# Altium PCB 数粒机接收板4通道.PcbDoc
Units mm, origin at the board's own origin, x right, y up, seen from the top; angles counter-clockwise.
Board outline 316 x 52 mm, 2 copper layers (Top Layer, Bottom Layer); 209 components, 115 nets, 612 pads, 93 vias.
Unrouted connection lines stored in the file: 388.
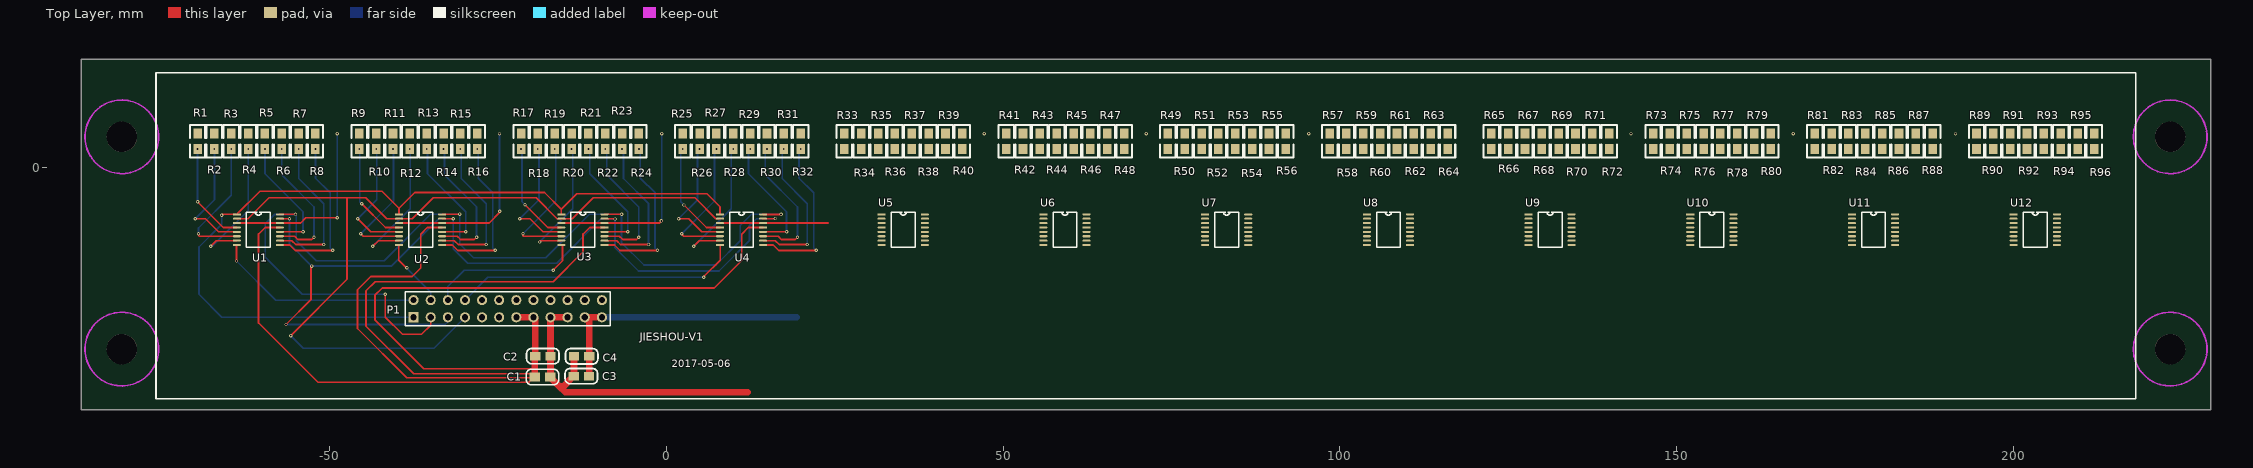
[diagram p0: Top Layer view]
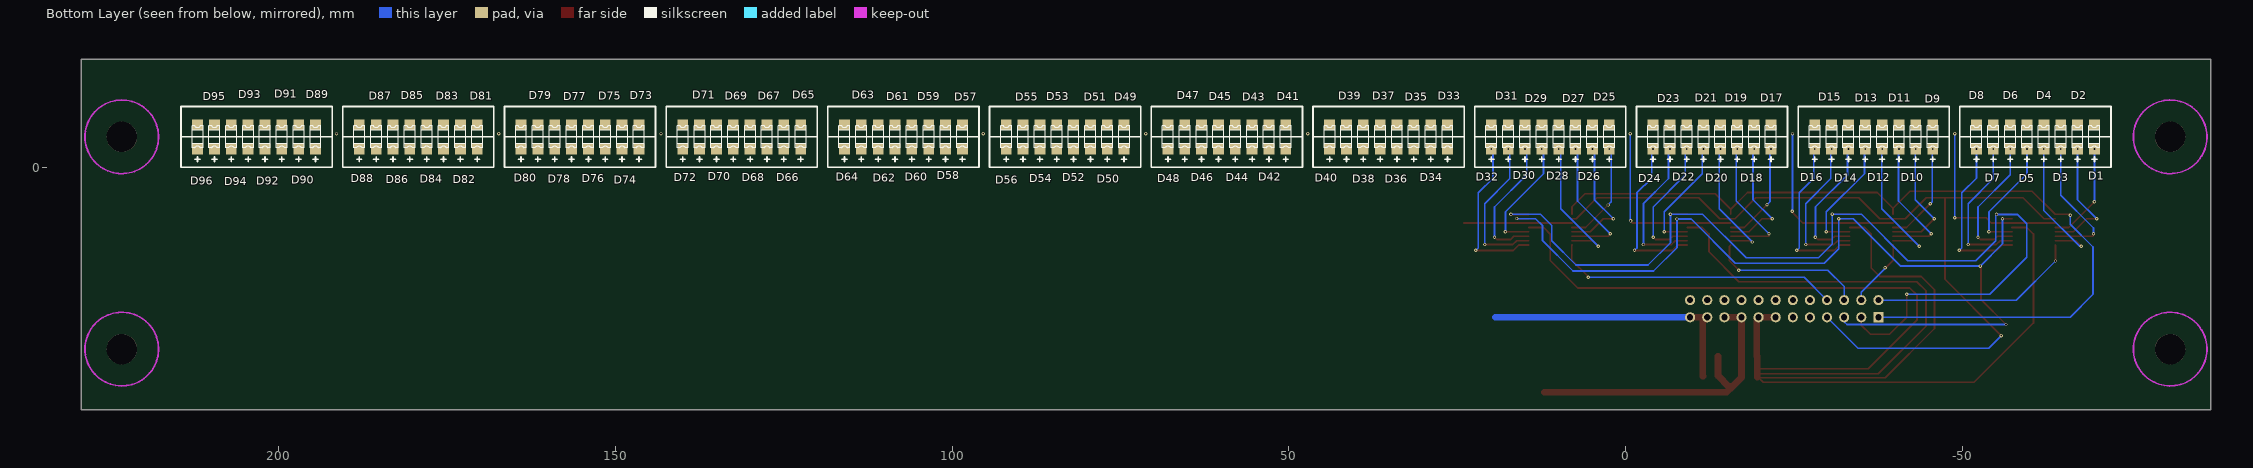
[diagram p1: Bottom Layer view, seen from below]

## Layer stack, top to bottom
Top Layer: signal copper 0.0356
Dielectric: dielectric 0.32, FR-4, Dk 4.8
Bottom Layer: signal copper 0.0356

## Board outline
-86.785,16 -86.785,-36 229.215,-36 229.215,16

## Design rules (kind name [scope] priority, off if disabled: settings)
Clearance [All] p1: gap=0.2
HoleSize [All] p1 off: absolutevalues=TRUE maxlimit=2.54 minlimit=0.025 maxpercent=80.000 minpercent=20.000
MinimumSolderMaskSliver [All] p1 off: minsoldermaskwidth=0.2
PolygonConnect [All] p1: connectstyle=Relief reliefconductorwidth=0.254 reliefentries=4 polygonreliefangle="90 Angle"
RoutingVias [All] p1: holewidth=0.254 width=0.508 viastyle="Through Hole" minholewidth=0.254 minwidth=0.508 maxholewidth=0.254 maxwidth=0.508
SilkToSilkClearance [All] p1: silktosilkclearance=-10
SilkscreenOverComponentPads [All] p1: minsilkscreentomaskgap=0
SolderMaskExpansion [All] p1: expansion=0.102
TestPointUsage [All] p1: valid=0 allowmultiple=FALSE
Testpoint [All] p1: side=3 testpointundercomponent=TRUE minsize=1.016 maxsize=2.54 preferedsize=1.524 minholesize=0 maxholesize=1.016 preferedholesize=0.813 testpointgrid=0.025 style=297 order=0123456789
Width [All] p1: maxlimit=2 minlimit=0.254 preferedwidth=0.254
20 further rules are at their usual default settings.

## Components (designator, comment, footprint, x,y, rotation, side; value= is the part's Value field where it differs from the comment)
C1 "贴片电容 10uf" 0805c -17.209,-31.14 r180 top
C2 "贴片电容" 0805c -17.158,-28.041 r180 top
C3 "贴片电容 10uf" 0805c -13.729,-31.013 r0 top
C4 "贴片电容" 0805c -13.678,-28.067 r0 top
D1 "红外接收珠子" jieshou1206 -69.535,2.7 r0 bottom
D2 "红外接收珠子" jieshou1206 -67.035,2.7 r0 bottom
D3 "红外接收珠子" jieshou1206 -64.535,2.7 r0 bottom
D4 "红外接收珠子" jieshou1206 -62.035,2.7 r0 bottom
D5 "红外接收珠子" jieshou1206 -59.535,2.7 r0 bottom
D6 "红外接收珠子" jieshou1206 -57.035,2.7 r0 bottom
D7 "红外接收珠子" jieshou1206 -54.535,2.7 r0 bottom
D8 "红外接收珠子" jieshou1206 -52.035,2.7 r0 bottom
D9 "红外接收珠子" jieshou1206 -45.535,2.7 r0 bottom
D10 "红外接收珠子" jieshou1206 -43.035,2.7 r0 bottom
D11 "红外接收珠子" jieshou1206 -40.535,2.7 r0 bottom
D12 "红外接收珠子" jieshou1206 -38.035,2.7 r0 bottom
D13 "红外接收珠子" jieshou1206 -35.535,2.7 r0 bottom
D14 "红外接收珠子" jieshou1206 -33.035,2.7 r0 bottom
D15 "红外接收珠子" jieshou1206 -30.535,2.7 r0 bottom
D16 "红外接收珠子" jieshou1206 -28.035,2.7 r0 bottom
D17 "红外接收珠子" jieshou1206 -21.535,2.7 r0 bottom
D18 "红外接收珠子" jieshou1206 -19.035,2.7 r0 bottom
D19 "红外接收珠子" jieshou1206 -16.535,2.7 r0 bottom
D20 "红外接收珠子" jieshou1206 -14.035,2.7 r0 bottom
D21 "红外接收珠子" jieshou1206 -11.535,2.7 r0 bottom
D22 "红外接收珠子" jieshou1206 -9.035,2.7 r0 bottom
D23 "红外接收珠子" jieshou1206 -6.535,2.7 r0 bottom
D24 "红外接收珠子" jieshou1206 -4.035,2.7 r0 bottom
D25 "红外接收珠子" jieshou1206 2.465,2.7 r0 bottom
D26 "红外接收珠子" jieshou1206 4.965,2.7 r0 bottom
D27 "红外接收珠子" jieshou1206 7.465,2.7 r0 bottom
D28 "红外接收珠子" jieshou1206 9.965,2.7 r0 bottom
D29 "红外接收珠子" jieshou1206 12.465,2.7 r0 bottom
D30 "红外接收珠子" jieshou1206 14.965,2.7 r0 bottom
D31 "红外接收珠子" jieshou1206 17.465,2.7 r0 bottom
D32 "红外接收珠子" jieshou1206 19.965,2.7 r0 bottom
D33 "红外接收珠子" jieshou1206 26.465,2.7 r0 bottom
D34 "红外接收珠子" jieshou1206 28.965,2.7 r0 bottom
D35 "红外接收珠子" jieshou1206 31.465,2.7 r0 bottom
D36 "红外接收珠子" jieshou1206 33.965,2.7 r0 bottom
D37 "红外接收珠子" jieshou1206 36.465,2.7 r0 bottom
D38 "红外接收珠子" jieshou1206 38.965,2.7 r0 bottom
D39 "红外接收珠子" jieshou1206 41.465,2.7 r0 bottom
D40 "红外接收珠子" jieshou1206 43.965,2.7 r0 bottom
D41 "红外接收珠子" jieshou1206 50.465,2.7 r0 bottom
D42 "红外接收珠子" jieshou1206 52.965,2.7 r0 bottom
D43 "红外接收珠子" jieshou1206 55.465,2.7 r0 bottom
D44 "红外接收珠子" jieshou1206 57.965,2.7 r0 bottom
D45 "红外接收珠子" jieshou1206 60.465,2.7 r0 bottom
D46 "红外接收珠子" jieshou1206 62.965,2.7 r0 bottom
D47 "红外接收珠子" jieshou1206 65.465,2.7 r0 bottom
D48 "红外接收珠子" jieshou1206 67.965,2.7 r0 bottom
D49 "红外接收珠子" jieshou1206 74.465,2.7 r0 bottom
D50 "红外接收珠子" jieshou1206 76.965,2.7 r0 bottom
D51 "红外接收珠子" jieshou1206 79.465,2.7 r0 bottom
D52 "红外接收珠子" jieshou1206 81.965,2.7 r0 bottom
D53 "红外接收珠子" jieshou1206 84.465,2.7 r0 bottom
D54 "红外接收珠子" jieshou1206 86.965,2.7 r0 bottom
D55 "红外接收珠子" jieshou1206 89.465,2.7 r0 bottom
D56 "红外接收珠子" jieshou1206 91.965,2.7 r0 bottom
D57 "红外接收珠子" jieshou1206 98.465,2.7 r0 bottom
D58 "红外接收珠子" jieshou1206 100.965,2.7 r0 bottom
D59 "红外接收珠子" jieshou1206 103.465,2.7 r0 bottom
D60 "红外接收珠子" jieshou1206 105.965,2.7 r0 bottom
D61 "红外接收珠子" jieshou1206 108.465,2.7 r0 bottom
D62 "红外接收珠子" jieshou1206 110.965,2.7 r0 bottom
D63 "红外接收珠子" jieshou1206 113.465,2.7 r0 bottom
D64 "红外接收珠子" jieshou1206 115.965,2.7 r0 bottom
D65 "红外接收珠子" jieshou1206 122.465,2.7 r0 bottom
D66 "红外接收珠子" jieshou1206 124.965,2.7 r0 bottom
D67 "红外接收珠子" jieshou1206 127.465,2.7 r0 bottom
D68 "红外接收珠子" jieshou1206 129.965,2.7 r0 bottom
D69 "红外接收珠子" jieshou1206 132.465,2.7 r0 bottom
D70 "红外接收珠子" jieshou1206 134.965,2.7 r0 bottom
D71 "红外接收珠子" jieshou1206 137.465,2.7 r0 bottom
D72 "红外接收珠子" jieshou1206 139.965,2.7 r0 bottom
D73 "红外接收珠子" jieshou1206 146.465,2.7 r0 bottom
D74 "红外接收珠子" jieshou1206 148.965,2.7 r0 bottom
D75 "红外接收珠子" jieshou1206 151.465,2.7 r0 bottom
D76 "红外接收珠子" jieshou1206 153.965,2.7 r0 bottom
D77 "红外接收珠子" jieshou1206 156.465,2.7 r0 bottom
D78 "红外接收珠子" jieshou1206 158.965,2.7 r0 bottom
D79 "红外接收珠子" jieshou1206 161.465,2.7 r0 bottom
D80 "红外接收珠子" jieshou1206 163.965,2.7 r0 bottom
D81 "红外接收珠子" jieshou1206 170.465,2.7 r0 bottom
D82 "红外接收珠子" jieshou1206 172.965,2.7 r0 bottom
D83 "红外接收珠子" jieshou1206 175.465,2.7 r0 bottom
D84 "红外接收珠子" jieshou1206 177.965,2.7 r0 bottom
D85 "红外接收珠子" jieshou1206 180.465,2.7 r0 bottom
D86 "红外接收珠子" jieshou1206 182.965,2.7 r0 bottom
D87 "红外接收珠子" jieshou1206 185.465,2.7 r0 bottom
D88 "红外接收珠子" jieshou1206 187.965,2.7 r0 bottom
D89 "红外接收珠子" jieshou1206 194.465,2.7 r0 bottom
D90 "红外接收珠子" jieshou1206 196.965,2.7 r0 bottom
D91 "红外接收珠子" jieshou1206 199.465,2.7 r0 bottom
D92 "红外接收珠子" jieshou1206 201.965,2.7 r0 bottom
D93 "红外接收珠子" jieshou1206 204.465,2.7 r0 bottom
D94 "红外接收珠子" jieshou1206 206.965,2.7 r0 bottom
D95 "红外接收珠子" jieshou1206 209.465,2.7 r0 bottom
D96 "红外接收珠子" jieshou1206 211.965,2.7 r0 bottom
P1 "牛角插座" HDR2X12 -37.478,-22.276 r0 top
R1 "贴片电阻" 0805r -69.543,4.986 r270 top
R2 "贴片电阻" 0805r -67.043,4.986 r270 top
R3 "贴片电阻" 0805r -64.543,4.986 r270 top
R4 "贴片电阻" 0805r -62.043,4.986 r270 top
R5 "贴片电阻" 0805r -59.543,4.986 r270 top
R6 "贴片电阻" 0805r -57.043,4.986 r270 top
R7 "贴片电阻" 0805r -54.543,4.986 r270 top
R8 "贴片电阻" 0805r -52.043,4.986 r270 top
R9 "贴片电阻" 0805r -45.535,4.986 r270 top
R10 "贴片电阻" 0805r -43.035,4.986 r270 top
R11 "贴片电阻" 0805r -40.535,4.986 r270 top
R12 "贴片电阻" 0805r -38.035,4.986 r270 top
R13 "贴片电阻" 0805r -35.535,4.986 r270 top
R14 "贴片电阻" 0805r -33.035,4.986 r270 top
R15 "贴片电阻" 0805r -30.535,4.986 r270 top
R16 "贴片电阻" 0805r -28.035,4.986 r270 top
R17 "贴片电阻" 0805r -21.535,4.986 r270 top
R18 "贴片电阻" 0805r -19.035,4.986 r270 top
R19 "贴片电阻" 0805r -16.535,4.986 r270 top
R20 "贴片电阻" 0805r -14.035,4.986 r270 top
R21 "贴片电阻" 0805r -11.535,4.986 r270 top
R22 "贴片电阻" 0805r -9.035,4.986 r270 top
R23 "贴片电阻" 0805r -6.535,4.986 r270 top
R24 "贴片电阻" 0805r -4.035,4.986 r270 top
R25 "贴片电阻" 0805r 2.465,4.986 r270 top
R26 "贴片电阻" 0805r 4.965,4.986 r270 top
R27 "贴片电阻" 0805r 7.465,4.986 r270 top
R28 "贴片电阻" 0805r 9.965,4.986 r270 top
R29 "贴片电阻" 0805r 12.465,4.986 r270 top
R30 "贴片电阻" 0805r 14.965,4.986 r270 top
R31 "贴片电阻" 0805r 17.465,4.986 r270 top
R32 "贴片电阻" 0805r 19.965,4.986 r270 top
R33 "贴片电阻" 0805r 26.457,4.986 r270 top
R34 "贴片电阻" 0805r 28.957,4.986 r270 top
R35 "贴片电阻" 0805r 31.457,4.986 r270 top
R36 "贴片电阻" 0805r 33.957,4.986 r270 top
R37 "贴片电阻" 0805r 36.457,4.986 r270 top
R38 "贴片电阻" 0805r 38.957,4.986 r270 top
R39 "贴片电阻" 0805r 41.457,4.986 r270 top
R40 "贴片电阻" 0805r 43.957,4.986 r270 top
R41 "贴片电阻" 0805r 50.465,4.986 r270 top
R42 "贴片电阻" 0805r 52.965,4.986 r270 top
R43 "贴片电阻" 0805r 55.465,4.986 r270 top
R44 "贴片电阻" 0805r 57.965,4.986 r270 top
R45 "贴片电阻" 0805r 60.465,4.986 r270 top
R46 "贴片电阻" 0805r 62.965,4.986 r270 top
R47 "贴片电阻" 0805r 65.465,4.986 r270 top
R48 "贴片电阻" 0805r 67.965,4.986 r270 top
R49 "贴片电阻" 0805r 74.465,4.986 r270 top
R50 "贴片电阻" 0805r 76.965,4.986 r270 top
R51 "贴片电阻" 0805r 79.465,4.986 r270 top
R52 "贴片电阻" 0805r 81.965,4.986 r270 top
R53 "贴片电阻" 0805r 84.465,4.986 r270 top
R54 "贴片电阻" 0805r 86.965,4.986 r270 top
R55 "贴片电阻" 0805r 89.465,4.986 r270 top
R56 "贴片电阻" 0805r 91.965,4.986 r270 top
R57 "贴片电阻" 0805r 98.465,4.986 r270 top
R58 "贴片电阻" 0805r 100.965,4.986 r270 top
R59 "贴片电阻" 0805r 103.465,4.986 r270 top
R60 "贴片电阻" 0805r 105.965,4.986 r270 top
R61 "贴片电阻" 0805r 108.465,4.986 r270 top
R62 "贴片电阻" 0805r 110.965,4.986 r270 top
R63 "贴片电阻" 0805r 113.465,4.986 r270 top
R64 "贴片电阻" 0805r 115.965,4.986 r270 top
R65 "贴片电阻" 0805r 122.457,4.986 r270 top
R66 "贴片电阻" 0805r 124.957,4.986 r270 top
R67 "贴片电阻" 0805r 127.457,4.986 r270 top
R68 "贴片电阻" 0805r 129.957,4.986 r270 top
R69 "贴片电阻" 0805r 132.457,4.986 r270 top
R70 "贴片电阻" 0805r 134.957,4.986 r270 top
R71 "贴片电阻" 0805r 137.457,4.986 r270 top
R72 "贴片电阻" 0805r 139.957,4.986 r270 top
R73 "贴片电阻" 0805r 146.465,4.986 r270 top
R74 "贴片电阻" 0805r 148.965,4.986 r270 top
R75 "贴片电阻" 0805r 151.465,4.986 r270 top
R76 "贴片电阻" 0805r 153.965,4.986 r270 top
R77 "贴片电阻" 0805r 156.465,4.986 r270 top
R78 "贴片电阻" 0805r 158.965,4.986 r270 top
R79 "贴片电阻" 0805r 161.465,4.986 r270 top
R80 "贴片电阻" 0805r 163.965,4.986 r270 top
R81 "贴片电阻" 0805r 170.465,4.986 r270 top
R82 "贴片电阻" 0805r 172.965,4.986 r270 top
R83 "贴片电阻" 0805r 175.465,4.986 r270 top
R84 "贴片电阻" 0805r 177.965,4.986 r270 top
R85 "贴片电阻" 0805r 180.465,4.986 r270 top
R86 "贴片电阻" 0805r 182.965,4.986 r270 top
R87 "贴片电阻" 0805r 185.465,4.986 r270 top
R88 "贴片电阻" 0805r 187.965,4.986 r270 top
R89 "贴片电阻" 0805r 194.465,4.986 r270 top
R90 "贴片电阻" 0805r 196.965,4.986 r270 top
R91 "贴片电阻" 0805r 199.465,4.986 r270 top
R92 "贴片电阻" 0805r 201.965,4.986 r270 top
R93 "贴片电阻" 0805r 204.465,4.986 r270 top
R94 "贴片电阻" 0805r 206.965,4.986 r270 top
R95 "贴片电阻" 0805r 209.465,4.986 r270 top
R96 "贴片电阻" 0805r 211.965,4.986 r270 top
U1 "集成电路" TSSOP16 -63.716,-7 r0 top
U2 "集成电路" TSSOP16 -39.637,-7 r0 top
U3 "集成电路" TSSOP16 -15.558,-7 r0 top
U4 "集成电路" TSSOP16 7.988,-7 r0 top
U5 "集成电路" TSSOP16 31.988,-7 r0 top
U6 "集成电路" TSSOP16 55.988,-7 r0 top
U7 "集成电路" TSSOP16 79.988,-7 r0 top
U8 "集成电路" TSSOP16 103.988,-7 r0 top
U9 "集成电路" TSSOP16 127.988,-7 r0 top
U10 "集成电路" TSSOP16 151.988,-7 r0 top
U11 "集成电路" TSSOP16 175.988,-7 r0 top
U12 "集成电路" TSSOP16 199.988,-7 r0 top

## Footprints (in the part's own frame and the unit in brackets; to place one, negate y for a bottom-side part, rotate by r counter-clockwise, add the part's x,y. Pads: shape width x height; smd on the part's side, far side on the other; paste and mask are expansions set on the pad)
0805c [mil]
  rect 60x50 smd: 1(0,0) 2(90,0)
  silkscreen extent -50,-45 140,45
0805r [mil]
  rect 60x50 smd: 1(0,0) 2(90,0)
  silkscreen extent -50,-45 140,45
HDR2X12 [mm] "Connector; Header; 12x2 Position"
  rect 1.5x1.5 hole 0.9: 1(0,0)
  round 1.5 hole 0.9: 2(0,2.54) 3(2.54,0) 4(2.54,2.54) 5(5.08,0) 6(5.08,2.54) 7(7.62,0) 8(7.62,2.54) 9(10.16,0) 10(10.16,2.54) 11(12.7,0) 12(12.7,2.54) 13(15.24,0) 14(15.24,2.54) 15(17.78,0) 16(17.78,2.54) 17(20.32,0) 18(20.32,2.54) 19(22.86,0) 20(22.86,2.54) 21(25.4,0) 22(25.4,2.54) 23(27.94,0) 24(27.94,2.54)
  silkscreen extent -1.27,-1.27 29.21,3.81
jieshou1206 [mm]
  rect 1.6x1.6 smd: 1(0,0) 2(0,-3.6)
  silkscreen extent -0.8,-3.41 0.82,1.9
TSSOP16 [mm] "ADG708"
  rect 1.2x0.3 smd: 1(0,0)
  oval 1.2x0.3 smd: 2(0,-0.65) 3(0,-1.3) 4(0,-1.95) 5(0,-2.6) 6(0,-3.25) 7(0,-3.9) 8(0,-4.55) 9(6.4,-4.55) 10(6.4,-3.9) 11(6.4,-3.25) 12(6.4,-2.6) 13(6.4,-1.95) 14(6.4,-1.3) 15(6.4,-0.65) 16(6.4,0)
  silkscreen extent 1.43,-4.88 4.96,0.33

## Part data
C1 C2 C3 C4: library part Cap, "Capacitor"
D1 D2 D3 D4 D5 D6 D7 D8 D9 D10 D11 D12 D13 D14 D15 D16 D17 D18 D19 D20 D21 D22 D23 D24 D25 D26 D27 D28 D29 D30 D31 D32 D33 D34 D35 D36 D37 D38 D39 D40 D41 D42 D43 D44 D45 D46 D47 D48 D49 D50 D51 D52 D53 D54 D55 D56 D57 D58 D59 D60 D61 D62 D63 D64 D65 D66 D67 D68 D69 D70 D71 D72 D73 D74 D75 D76 D77 D78 D79 D80 D81 D82 D83 D84 D85 D86 D87 D88 D89 D90 D91 D92 D93 D94 D95 D96: library part LED0, "PD15-21B/TR8"
P1: library part "Header 12X2", "Header, 12-Pin, Dual row"
R1 R2 R3 R4 R5 R6 R7 R8 R9 R10 R11 R12 R13 R14 R15 R16 R17 R18 R19 R20 R21 R22 R23 R24 R25 R26 R27 R28 R29 R30 R31 R32: library part Res3
R33 R34 R35 R36 R37 R38 R39 R40 R41 R42 R43 R44 R45 R46 R47 R48 R49 R50 R51 R52 R53 R54 R55 R56 R57 R58 R59 R60 R61 R62 R63 R64 R65 R66 R67 R68 R69 R70 R71 R72 R73 R74 R75 R76 R77 R78 R79 R80 R81 R82 R83 R84 R85 R86 R87 R88 R89 R90 R91 R92 R93 R94 R95 R96: library part Res3, "电阻"
U1 U2 U3 U4: library part ADG708
U5 U6 U7 U8 U9 U10 U11 U12: library part ADG708, "ADG708BRU-REEL"

## Free pads (board coordinates)
  round 4.5 hole 4.5 unplated: 1(-80.785,4.5) 2(-80.785,-27) 5(223.215,4.5) 6(223.215,-27)

## Via types
v1: diameter 0.508, hole 0.254, Top Layer to Bottom Layer, 93 vias

## Nets (pads, with @x,y where several pads share a name; then routed paths per layer and width w, separated by ;. In a path a pad name is that pad's centre, name@x,y a point inside that pad or via, vN(x,y) a via of type N, cw(c..) or ccw(c..) an arc to the next point about the centre after c; other vN are vias at no path point)
A0: P1.1 U1.1 U2.1 U3.1 U4.1 U5.1 U6.1 U7.1 U8.1 U9.1 U10.1 U11.1 U12.1 | length 129.5
  Top Layer w0.254: v1(-65.977,-7.137) -65.84,-7 U1.1 -60.272,-3.556 -42.177,-3.556 -39.637,-6.096 ; U2.1 -39.637,-6.096 ; U3.1 -15.558,-6.248 ; U4.1 7.988,-5.867 6.058,-3.937 -13.246,-3.937 -15.558,-6.248 ; -39.637,-6.096 -37.3,-3.759 -18.047,-3.759 -15.558,-6.248
  Bottom Layer w0.254: v1(-65.977,-7.137) -65.951,-7.163 -65.951,-8.458 -69.33,-11.836 -69.33,-18.872 -65.926,-22.276 P1.1
A1: P1.3 U1.16 U2.16 U3.16 U4.16 U5.16 U6.16 U7.16 U8.16 U9.16 U10.16 U11.16 U12.16 | length 151.1
  Top Layer w0.254: U1.16 -55.014,-7 v1(-55.004,-7.01) ; v1(-41.669,-18.872) -41.669,-22.276 -39.129,-24.816 -36.31,-24.816 -34.938,-23.444 P1.3 ; U2.16 v1@-30.706,-7 ; U3.16 -6.632,-7 v1(-6.617,-6.985) ; U4.16 14.398,-7.01 v1(17.056,-7.01)
  Bottom Layer w0.254: v1(-41.669,-18.872) -53.988,-18.872 -59.474,-13.386 -59.474,-8.407 -58.077,-7.01 v1(-55.004,-7.01) -54.877,-7.137 -54.877,-10.896 -51.905,-13.868 -41.847,-13.868 -34.979,-7 -30.686,-7 v1(-30.645,-6.959) -30.645,-11.404 -28.588,-13.462 -17.844,-13.462 -11.367,-6.985 v1(-6.617,-6.985) -6.617,-11.201 -3.29,-14.529 7.404,-14.529 11.011,-10.922 11.011,-8.661 12.672,-7 17.046,-7 v1(17.056,-7.01)
A2: P1.5 U1.15 U2.15 U3.15 U4.15 U5.15 U6.15 U7.15 U8.15 U9.15 U10.15 U11.15 U12.15 | length 139.9
  Top Layer w0.254: U1.15 v1(-55.898,-7.65) ; v1(-56.411,-23.353) -52.718,-19.659 -52.718,-14.808 v1(-52.591,-14.681) ; U2.15 v1(-31.611,-7.65) ; U3.15 v1@-7.582,-7.65 ; U4.15 16.187,-7.65 v1(16.218,-7.62)
  Bottom Layer w0.254: v1(-56.411,-23.353) -32.815,-23.353 -32.398,-22.936 P1.5 ; v1(-55.898,-7.65) -55.898,-11.374 v1(-52.591,-14.681) -40.78,-14.681 -33.749,-7.65 v1(-31.611,-7.65) -31.611,-12.09 -29.452,-14.249 -16.244,-14.249 -9.69,-7.696 v1(-7.582,-7.696) -7.582,-11.938 -4.102,-15.418 7.836,-15.418 12.357,-10.896 12.357,-8.712 13.419,-7.65 16.187,-7.65 v1(16.218,-7.62)
CH1: P1.2 U1.8 | length 31.1
  Top Layer w0.254: v1(-63.767,-13.919) -63.767,-11.601 U1.8
  Bottom Layer w0.254: v1(-63.767,-13.919) -57.95,-19.736 P1.2
CH1-1: D1.1 R1.2 U1.4 | length 15.2
  Top Layer w0.254: v1(-69.543,-5.128) -65.72,-8.95 U1.4
  Bottom Layer w0.254: v1(-69.543,-5.128) -69.535,-5.12 v1(-69.535,2.7)
CH1-2: D2.1 R2.2 U1.5 | length 18.5
  Top Layer w0.254: v1(-69.863,-7.671) -68.364,-7.671 -66.435,-9.6 U1.5
  Bottom Layer w0.254: v1(-69.863,-7.671) -67.035,-4.843 D2.1
  other v1: -67.043,2.7
CH1-3: D3.1 R3.2 U1.6 | length 20.6
  Top Layer w0.254: v1(-69.406,-9.88) -69.406,-10.109 -69.265,-10.25 U1.6
  Bottom Layer w0.254: v1(-69.406,-9.88) -69.406,-9.017 -64.535,-4.146 v1(-64.535,2.7)
CH1-4: D4.1 R4.2 U1.7 | length 21.1
  Top Layer w0.254: v1(-67.602,-11.737) -66.766,-10.9 U1.7
  Bottom Layer w0.254: v1(-67.602,-11.737) -67.341,-11.737 -62.035,-6.431 v1(-62.035,2.7)
CH1-5: D5.1 R5.2 U1.12 | length 18.1
  Top Layer w0.254: U1.12 -53.911,-9.6 v1(-53.886,-9.576)
  Bottom Layer w0.254: D5.1 -59.535,-0.981 -53.886,-6.629 v1(-53.886,-9.576)
  other v1: -59.543,2.7
CH1-6: D6.1 R6.2 U1.11 | length 20.5
  Top Layer w0.254: U1.11 -55.142,-10.25 -54.648,-10.744 -52.616,-10.744 v1(-52.261,-10.388)
  Bottom Layer w0.254: D6.1 -57.035,-1.144 -52.261,-5.918 v1(-52.261,-10.388)
  other v1: -57.043,2.7
CH1-7: D7.1 R7.2 U1.10 | length 22.5
  Top Layer w0.254: U1.10 -55.559,-10.9 -54.979,-11.481 v1(-50.813,-11.481)
  Bottom Layer w0.254: v1(-54.535,2.7) -54.535,-1.688 -50.813,-5.41 v1(-50.813,-11.481)
CH1-8: D8.1 R8.2 U1.9 | length 24.3
  Top Layer w0.254: U1.9 -55.874,-11.55 -55.055,-12.37 -49.518,-12.37 v1(-49.492,-12.344)
  Bottom Layer w0.254: v1(-52.035,2.7) -52.035,-1.623 -49.848,-3.81 -49.848,-11.989 v1(-49.492,-12.344)
CH2: P1.4 U2.8 | length 10.3
  Top Layer w0.254: U2.8 -39.688,-11.601 -39.688,-13.817 -38.57,-14.935 v1(-38.469,-14.935)
  Bottom Layer w0.254: v1(-38.469,-14.935) -38.494,-14.96 -38.494,-14.986 -34.938,-18.542 P1.4
CH2-1: D9.1 R9.2 U2.4 | length 15.3
  Top Layer w0.254: v1(-45.156,-5.435) -41.641,-8.95 U2.4
  Bottom Layer w0.254: v1(-45.535,2.7) -45.464,2.629 -45.464,-5.128 v1(-45.156,-5.435)
CH2-2: D10.1 R10.2 U2.5 | length 18.5
  Top Layer w0.254: v1(-45.784,-7.671) -43.854,-9.6 U2.5
  Bottom Layer w0.254: v1(-45.784,-7.671) -42.956,-4.843 D10.1@-42.956,2.7
  other v1: -43.035,2.7
CH2-3: D11.1 R11.2 U2.6 | length 20.4
  Top Layer w0.254: v1(-45.327,-9.88) -44.957,-10.25 U2.6
  Bottom Layer w0.254: v1(-45.327,-9.88) -40.456,-5.01 D11.1@-40.456,2.7
  other v1: -40.535,2.7
CH2-4: D12.1 R12.2 U2.7 | length 21
  Top Layer w0.254: v1(-43.523,-11.737) -42.686,-10.9 U2.7
  Bottom Layer w0.254: v1(-43.523,-11.737) -37.956,-6.169 D12.1@-37.956,2.7
  other v1: -38.035,2.7
CH2-5: D13.1 R13.2 U2.12 | length 18.1
  Top Layer w0.254: U2.12@-33.186,-9.6 -29.781,-9.6 v1(-29.756,-9.576)
  Bottom Layer w0.254: D13.1@-35.405,2.7 -35.405,-0.981 -29.756,-6.629 v1(-29.756,-9.576)
  other v1: -35.535,2.7
CH2-6: D14.1 R14.2 U2.11 | length 20.5
  Top Layer w0.254: U2.11@-33.186,-10.25 -31.012,-10.25 -30.518,-10.744 -28.486,-10.744 v1(-28.131,-10.388)
  Bottom Layer w0.254: D14.1@-32.905,2.7 -32.905,-1.144 -28.131,-5.918 v1(-28.131,-10.388)
  other v1: -33.035,2.7
CH2-7: D15.1 R15.2 U2.10 | length 22.5
  Top Layer w0.254: U2.10@-33.186,-10.9 -31.429,-10.9 -30.849,-11.481 v1(-26.683,-11.481)
  Bottom Layer w0.254: D15.1@-30.405,2.7 -30.405,-1.688 -26.683,-5.41 v1(-26.683,-11.481)
  other v1: -30.535,2.7
CH2-8: D16.1 R16.2 U2.9 | length 24.3
  Top Layer w0.254: U2.9@-33.186,-11.55 -31.744,-11.55 -30.925,-12.37 -25.388,-12.37 v1(-25.362,-12.344)
  Bottom Layer w0.254: D16.1@-27.905,2.7 -27.905,-1.623 -25.718,-3.81 -25.718,-11.989 v1(-25.362,-12.344)
  other v1: -28.035,2.7
CH3: P1.6 U3.8 | length 23.1
  Top Layer w0.254: v1(-16.752,-15.291) -16.752,-15.265 -15.38,-13.894 -15.38,-11.728 U3.8
  Bottom Layer w0.254: P1.6 -32.398,-17.704 -29.985,-15.291 v1(-16.752,-15.291)
CH3-1: D17.1 R17.2 U3.4 | length 15.3
  Top Layer w0.254: v1(-20.944,-5.568) -17.562,-8.95 U3.4
  Bottom Layer w0.254: v1(-21.535,2.7) -21.385,2.55 -21.385,-5.128 v1(-20.944,-5.568)
CH3-2: D18.1 R18.2 U3.5 | length 18.5
  Top Layer w0.254: v1(-21.705,-7.671) -20.206,-7.671 -18.277,-9.6 U3.5
  Bottom Layer w0.254: v1(-21.705,-7.671) -18.877,-4.843 D18.1@-18.877,2.7
  other v1: -19.035,2.7
CH3-3: D19.1 R19.2 U3.6 | length 20.6
  Top Layer w0.254: v1(-21.247,-9.88) -21.247,-10.185 -21.183,-10.25 U3.6
  Bottom Layer w0.254: v1(-21.247,-9.88) -16.377,-5.01 D19.1@-16.377,2.7
  other v1: -16.535,2.7
CH3-4: D20.1 R20.2 U3.7 | length 19.1
  Top Layer w0.254: v1(-18.758,-11.1) -18.758,-11.051 -18.607,-10.9 U3.7
  Bottom Layer w0.254: v1(-18.758,-11.1) -18.758,-11.051 -13.877,-6.169 D20.1@-13.877,2.7
  other v1: -14.035,2.7
CH3-5: D21.1 R21.2 U3.12 | length 18.1
  Top Layer w0.254: U3.12@-9.107,-9.6 -5.702,-9.6 v1(-5.677,-9.576)
  Bottom Layer w0.254: D21.1@-11.326,2.7 -11.326,-0.981 -5.677,-6.629 v1(-5.677,-9.576)
  other v1: -11.535,2.7
CH3-6: D22.1 R22.2 U3.11 | length 20.5
  Top Layer w0.254: U3.11@-9.107,-10.25 -6.933,-10.25 -6.439,-10.744 -4.407,-10.744 v1(-4.052,-10.388)
  Bottom Layer w0.254: D22.1@-8.826,2.7 -8.826,-1.144 -4.052,-5.918 v1(-4.052,-10.388)
  other v1: -9.035,2.7
CH3-7: D23.1 R23.2 U3.10 | length 22.5
  Top Layer w0.254: U3.10@-9.107,-10.9 -7.35,-10.9 -6.769,-11.481 v1(-2.604,-11.481)
  Bottom Layer w0.254: D23.1@-6.326,2.7 -6.326,-1.688 -2.604,-5.41 v1(-2.604,-11.481)
  other v1: -6.535,2.7
CH3-8: D24.1 R24.2 U3.9 | length 24.3
  Top Layer w0.254: U3.9@-9.107,-11.55 -7.665,-11.55 -6.846,-12.37 -1.308,-12.37 v1(-1.283,-12.344)
  Bottom Layer w0.254: D24.1@-3.826,2.7 -3.826,-1.623 -1.639,-3.81 -1.639,-11.989 v1(-1.283,-12.344)
  other v1: -4.035,2.7
CH4: P1.8 U4.8 | length 42.6
  Top Layer w0.254: v1(5.6,-16.332) 5.6,-16.23 8.039,-13.792 8.039,-11.601 U4.8
  Bottom Layer w0.254: P1.8 -26.48,-16.357 v1@5.499,-16.357
CH4-1: D25.1 R25.2 U4.4 | length 15.4
  Top Layer w0.254: v1(2.644,-5.611) 5.984,-8.95 U4.4
  Bottom Layer w0.254: v1(2.465,2.7) 2.161,2.396 2.161,-5.128 v1(2.644,-5.611)
CH4-2: D26.1 R26.2 U4.5 | length 18.5
  Top Layer w0.254: v1(1.841,-7.671) 3.34,-7.671 5.269,-9.6 U4.5
  Bottom Layer w0.254: v1(1.841,-7.671) 4.669,-4.843 D26.1@4.669,2.7
  other v1: 4.965,2.7
CH4-3: D27.1 R27.2 U4.6 | length 20.5
  Top Layer w0.254: v1(2.298,-9.88) 2.298,-9.931 2.617,-10.25 U4.6
  Bottom Layer w0.254: v1(2.298,-9.88) 7.169,-5.01 D27.1@7.169,2.7
  other v1: 7.465,2.7
CH4-4: D28.1 R28.2 U4.7 | length 21
  Top Layer w0.254: v1(4.102,-11.737) 4.939,-10.9 U4.7
  Bottom Layer w0.254: v1(4.102,-11.737) 9.669,-6.169 D28.1@9.669,2.7
  other v1: 9.965,2.7
CH4-5: D29.1 R29.2 U4.12 | length 18.1
  Top Layer w0.254: U4.12@14.439,-9.6 17.844,-9.6 v1(17.869,-9.576)
  Bottom Layer w0.254: D29.1@12.22,2.7 12.22,-0.981 17.869,-6.629 v1(17.869,-9.576)
  other v1: 12.465,2.7
CH4-6: D30.1 R30.2 U4.11 | length 20.5
  Top Layer w0.254: U4.11@14.439,-10.25 16.613,-10.25 17.107,-10.744 19.139,-10.744 v1(19.494,-10.388)
  Bottom Layer w0.254: D30.1@14.72,2.7 14.72,-1.144 19.494,-5.918 v1(19.494,-10.388)
  other v1: 14.965,2.7
CH4-7: D31.1 R31.2 U4.10 | length 22.5
  Top Layer w0.254: U4.10@14.439,-10.9 16.196,-10.9 16.776,-11.481 v1(20.942,-11.481)
  Bottom Layer w0.254: D31.1@17.22,2.7 17.22,-1.688 20.942,-5.41 v1(20.942,-11.481)
  other v1: 17.465,2.7
CH4-8: D32.1 R32.2 U4.9 | length 24.3
  Top Layer w0.254: U4.9@14.439,-11.55 15.881,-11.55 16.7,-12.37 22.237,-12.37 v1(22.263,-12.344)
  Bottom Layer w0.254: D32.1@19.72,2.7 19.72,-1.623 21.907,-3.81 21.907,-11.989 v1(22.263,-12.344)
  other v1: 19.965,2.7
CH5: P1.10 U5.8
CH5-1: D33.1 R33.2 U5.4
CH5-2: D34.1 R34.2 U5.5
CH5-3: D35.1 R35.2 U5.6
CH5-4: D36.1 R36.2 U5.7
CH5-5: D37.1 R37.2 U5.12
CH5-6: D38.1 R38.2 U5.11
CH5-7: D39.1 R39.2 U5.10
CH5-8: D40.1 R40.2 U5.9
CH6: P1.12 U6.8
CH6-1: D41.1 R41.2 U6.4
CH6-2: D42.1 R42.2 U6.5
CH6-3: D43.1 R43.2 U6.6
CH6-4: D44.1 R44.2 U6.7
CH6-5: D45.1 R45.2 U6.12
CH6-6: D46.1 R46.2 U6.11
CH6-7: D47.1 R47.2 U6.10
CH6-8: D48.1 R48.2 U6.9
CH7: P1.14 U7.8
CH7-1: D49.1 R49.2 U7.4
CH7-2: D50.1 R50.2 U7.5
CH7-3: D51.1 R51.2 U7.6
CH7-4: D52.1 R52.2 U7.7
CH7-5: D53.1 R53.2 U7.12
CH7-6: D54.1 R54.2 U7.11
CH7-7: D55.1 R55.2 U7.10
CH7-8: D56.1 R56.2 U7.9
CH8: P1.16 U8.8
CH8-1: D57.1 R57.2 U8.4
CH8-2: D58.1 R58.2 U8.5
CH8-3: D59.1 R59.2 U8.6
CH8-4: D60.1 R60.2 U8.7
CH8-5: D61.1 R61.2 U8.12
CH8-6: D62.1 R62.2 U8.11
CH8-7: D63.1 R63.2 U8.10
CH8-8: D64.1 R64.2 U8.9
CH9: P1.18 U9.8
CH9-1: D65.1 R65.2 U9.4
CH9-2: D66.1 R66.2 U9.5
CH9-3: D67.1 R67.2 U9.6
CH9-4: D68.1 R68.2 U9.7
CH9-5: D69.1 R69.2 U9.12
CH9-6: D70.1 R70.2 U9.11
CH9-7: D71.1 R71.2 U9.10
CH9-8: D72.1 R72.2 U9.9
CH10: P1.20 U10.8
CH10-1: D73.1 R73.2 U10.4
CH10-2: D74.1 R74.2 U10.5
CH10-3: D75.1 R75.2 U10.6
CH10-4: D76.1 R76.2 U10.7
CH10-5: D77.1 R77.2 U10.12
CH10-6: D78.1 R78.2 U10.11
CH10-7: D79.1 R79.2 U10.10
CH10-8: D80.1 R80.2 U10.9
CH11: P1.22 U11.8
CH11-1: D81.1 R81.2 U11.4
CH11-2: D82.1 R82.2 U11.5
CH11-3: D83.1 R83.2 U11.6
CH11-4: D84.1 R84.2 U11.7
CH11-5: D85.1 R85.2 U11.12
CH11-6: D86.1 R86.2 U11.11
CH11-7: D87.1 R87.2 U11.10
CH11-8: D88.1 R88.2 U11.9
CH12: P1.24 U12.8
CH12-1: D89.1 R89.2 U12.4
CH12-2: D90.1 R90.2 U12.5
CH12-3: D91.1 R91.2 U12.6
CH12-4: D92.1 R92.2 U12.7
CH12-5: D93.1 R93.2 U12.12
CH12-6: D94.1 R94.2 U12.11
CH12-7: D95.1 R95.2 U12.10
CH12-8: D96.1 R96.2 U12.9
EN: P1.7 U1.2 U2.2 U3.2 U4.2 U5.2 U6.2 U7.2 U8.2 U9.2 U10.2 U11.2 U12.2 | length 131.9
  Top Layer w0.254: U1.2 -62.045,-7.65 -58.941,-4.547 -47.409,-4.547 ; v1(-55.715,-24.993) -47.359,-16.637 -47.359,-4.597 -47.409,-4.547 ; U4.2 7.383,-7.65 4.28,-4.547 -10.808,-4.547 -13.912,-7.65 U3.2 -16.188,-7.65 -19.291,-4.547 -34.557,-4.547 -37.661,-7.65 U2.2 -41.461,-7.65 -44.564,-4.547 -47.409,-4.547
  Bottom Layer w0.254: v1(-55.715,-24.993) -53.836,-26.873 -34.455,-26.873 P1.7
GND: C1.1 C2.1 C3.1 C4.1 P1.17 P1.19 R1.1 R2.1 R3.1 R4.1 R5.1 R6.1 R7.1 R8.1 R9.1 R10.1 R11.1 R12.1 R13.1 R14.1 R15.1 R16.1 R17.1 R18.1 R19.1 R20.1 R21.1 R22.1 R23.1 R24.1 R25.1 R26.1 R27.1 R28.1 R29.1 R30.1 R31.1 R32.1 R33.1 R34.1 R35.1 R36.1 R37.1 R38.1 R39.1 R40.1 R41.1 R42.1 R43.1 R44.1 R45.1 R46.1 R47.1 R48.1 R49.1 R50.1 R51.1 R52.1 R53.1 R54.1 R55.1 R56.1 R57.1 R58.1 R59.1 R60.1 R61.1 R62.1 R63.1 R64.1 R65.1 R66.1 R67.1 R68.1 R69.1 R70.1 R71.1 R72.1 R73.1 R74.1 R75.1 R76.1 R77.1 R78.1 R79.1 R80.1 R81.1 R82.1 R83.1 R84.1 R85.1 R86.1 R87.1 R88.1 R89.1 R90.1 R91.1 R92.1 R93.1 R94.1 R95.1 R96.1 U1.3 U1.14 U2.3 U2.14 U3.3 U3.14 U4.3 U4.14 U5.3 U5.14 U6.3 U6.14 U7.3 U7.14 U8.3 U8.14 U9.3 U9.14 U10.3 U10.14 U11.3 U11.14 U12.3 U12.14 | length 146.6
  Top Layer w0.254: U1.3 U1.14@-57.239,-8.3 ; U1.14 -54.262,-8.3 -53.48,-7.518 v1(-48.806,-7.518) ; U2.3 U2.14 -26.296,-8.3 -24.626,-6.629 -24.626,-6.604 v1(-24.702,-6.528) ; U3.3 U3.14 -1.023,-8.3 v1(-0.699,-7.975) ; U4.3 U4.14 24.066,-8.3
  Top Layer w1: P1.19 P1.17 C2.1 -17.158,-31.089 C1.1 -15.812,-32.537 ; C4.1 -13.678,-30.962 C3.1 -15.253,-32.537 -15.812,-32.537 ; 12.103,-33.401 -14.948,-33.401 -15.812,-32.537
  Bottom Layer w0.254: v1(-48.806,-7.518) v1(-48.806,4.986) ; v1@-24.727,-6.55 v1(-24.727,4.986) ; v1(-0.699,-7.975) -0.648,-7.925 v1(-0.648,4.986)
VCC3.3: C3.2 C4.2 D1.2 D2.2 D3.2 D4.2 D5.2 D6.2 D7.2 D8.2 D9.2 D10.2 D11.2 D12.2 D13.2 D14.2 D15.2 D16.2 D17.2 D18.2 D19.2 D20.2 D21.2 D22.2 D23.2 D24.2 D25.2 D26.2 D27.2 D28.2 D29.2 D30.2 D31.2 D32.2 D33.2 D34.2 D35.2 D36.2 D37.2 D38.2 D39.2 D40.2 D41.2 D42.2 D43.2 D44.2 D45.2 D46.2 D47.2 D48.2 D49.2 D50.2 D51.2 D52.2 D53.2 D54.2 D55.2 D56.2 D57.2 D58.2 D59.2 D60.2 D61.2 D62.2 D63.2 D64.2 D65.2 D66.2 D67.2 D68.2 D69.2 D70.2 D71.2 D72.2 D73.2 D74.2 D75.2 D76.2 D77.2 D78.2 D79.2 D80.2 D81.2 D82.2 D83.2 D84.2 D85.2 D86.2 D87.2 D88.2 D89.2 D90.2 D91.2 D92.2 D93.2 D94.2 D95.2 D96.2 P1.21 P1.23 | length 40.5
  Top Layer w1: C3.2 -11.392,-30.962 C4.2 -11.392,-22.961 P1.21 P1.23
  Bottom Layer w1: P1.23 19.342,-22.276
VCC5V: C1.2 C2.2 P1.13 P1.15 U1.13 U2.13 U3.13 U4.13 U5.13 U6.13 U7.13 U8.13 U9.13 U10.13 U11.13 U12.13 | length 296.4
  Top Layer w0.254: U1.13 -59.509,-8.95 -60.49,-9.931 -60.49,-23.114 -51.677,-31.928 -20.384,-31.928 C1.2@-19.596,-31.14 ; U2.13 -35.43,-8.95 -36.411,-9.931 -36.411,-14.96 -37.681,-16.23 -43.853,-16.23 -45.809,-18.186 -45.809,-23.952 -38.494,-31.267 -19.723,-31.267 C1.2@-19.596,-31.14 ; -19.495,-29.794 -19.596,-29.896 -35.979,-29.896 -43.218,-22.657 -43.218,-18.999 -42.152,-17.932 7.124,-17.932 11.214,-13.843 11.214,-9.931 12.195,-8.95 U4.13 ; U3.13 -11.351,-8.95 -12.332,-9.931 -12.332,-12.547 -16.777,-16.992 -43.193,-16.992 -44.539,-18.339 -44.539,-23.596 -37.478,-30.658 -19.977,-30.658 C1.2 C1.2@-19.596,-31.14
  Top Layer w1: P1.13 P1.15 -19.444,-22.53 C2.2 -19.495,-28.092 -19.495,-29.794 C1.2
pads on no net: P1.9 P1.11
copper on no net:
  other v1: 47.194,4.986 71.273,4.986 95.352,4.986 143.194,4.986 167.273,4.986 191.352,4.986

## Keep-outs
Keep-Out Layer:
  circle w0.254: c223.215,4.5 r5.461
  circle w0.254: c223.215,-27 r5.461
  circle w0.254: c-80.785,-27 r5.461
  circle w0.254: c-80.785,4.5 r5.461

## Silkscreen, mask and mechanical layers (free items; w line width, h text height)
Top Overlay:
  lines w0.254: -75.721,-34.347 -75.721,14.013 218.08,14.013 ; -75.713,-34.356 218.08,-34.356 218.08,14.004
  text "JIESHOU-V1" at -3.905,-25.789 h1.2
  text "2017-05-06" at 0.825,-29.701 h1.1
Bottom Overlay:
  lines w0.254: -72,4.5 -60.785,4.5 -49.57,4.5 ; -48,4.5 -36.785,4.5 -25.57,4.5 ; -24,4.5 -12.785,4.5 -1.57,4.5 ; 0,4.5 11.215,4.5 22.43,4.5 ; 24,4.5 35.215,4.5 ; 118.43,4.5 107.215,4.5 ; 120,4.5 131.215,4.5 ; 166.43,4.5 155.215,4.5 ; 166.43,4.5 155.215,4.5 ; 214.43,4.5 203.215,4.5 ; 35.215,4.5 46.43,4.5 35.215,4.5 ; 59.215,4.5 70.43,4.5 59.215,4.5 ; 59.215,4.5 48,4.5 59.215,4.5 ; 83.215,4.5 72,4.5 83.215,4.5 ; 83.215,4.5 94.43,4.5 83.215,4.5 ; 107.215,4.5 96,4.5 107.215,4.5 ; 131.215,4.5 142.43,4.5 131.215,4.5 ; 155.215,4.5 144,4.5 155.215,4.5 ; 179.215,4.5 168,4.5 179.215,4.5 ; 179.215,4.5 190.43,4.5 179.215,4.5 ; 203.215,4.5 192,4.5 203.215,4.5 ; -72,0 -72,9 -49.57,9 -49.57,0 -72,0 ; -48,0 -25.57,0 -25.57,9 -48,9 -48,0 ; -24,0 -24,9 -1.57,9 -1.57,0 -24,0 ; 0,0 0,9 22.43,9 22.43,0 0,0 ; 24,0 46.43,0 46.43,9 24,9 24,0 ; 48,0 70.43,0 70.43,9 48,9 48,0 ; 72,0 94.43,0 94.43,9 72,9 72,0 ; 96,0 118.43,0 118.43,9 96,9 96,0 ; 120,0 142.43,0 142.43,9 120,9 120,0 ; 144,0 166.43,0 166.43,9 144,9 144,0 ; 168,0 190.43,0 190.43,9 168,9 168,0 ; 192,0 214.43,0 214.43,9 192,9 192,0
Mechanical 1:
  the board outline again, w0.254

## Dimensions
-72,9 to -48,9 on Top Overlay
-86.785,-36 to 229.215,-36 on Top Overlay
-86.785,16 to -86.785,-36 on Top Overlay
-80.785,4.5 to 223.215,4.5 on Top Overlay
223.215,4.5 to 223.215,-27 on Top Overlay